# Altium PCB PCB-MOTION-V1.0.PcbDoc
Units mm, origin at the board's own origin, x right, y up, seen from the top; angles counter-clockwise.
Board outline 100 x 93 mm, 2 copper layers (Top Layer, Bottom Layer); 38 components, 31 nets, 120 pads, 10 vias.
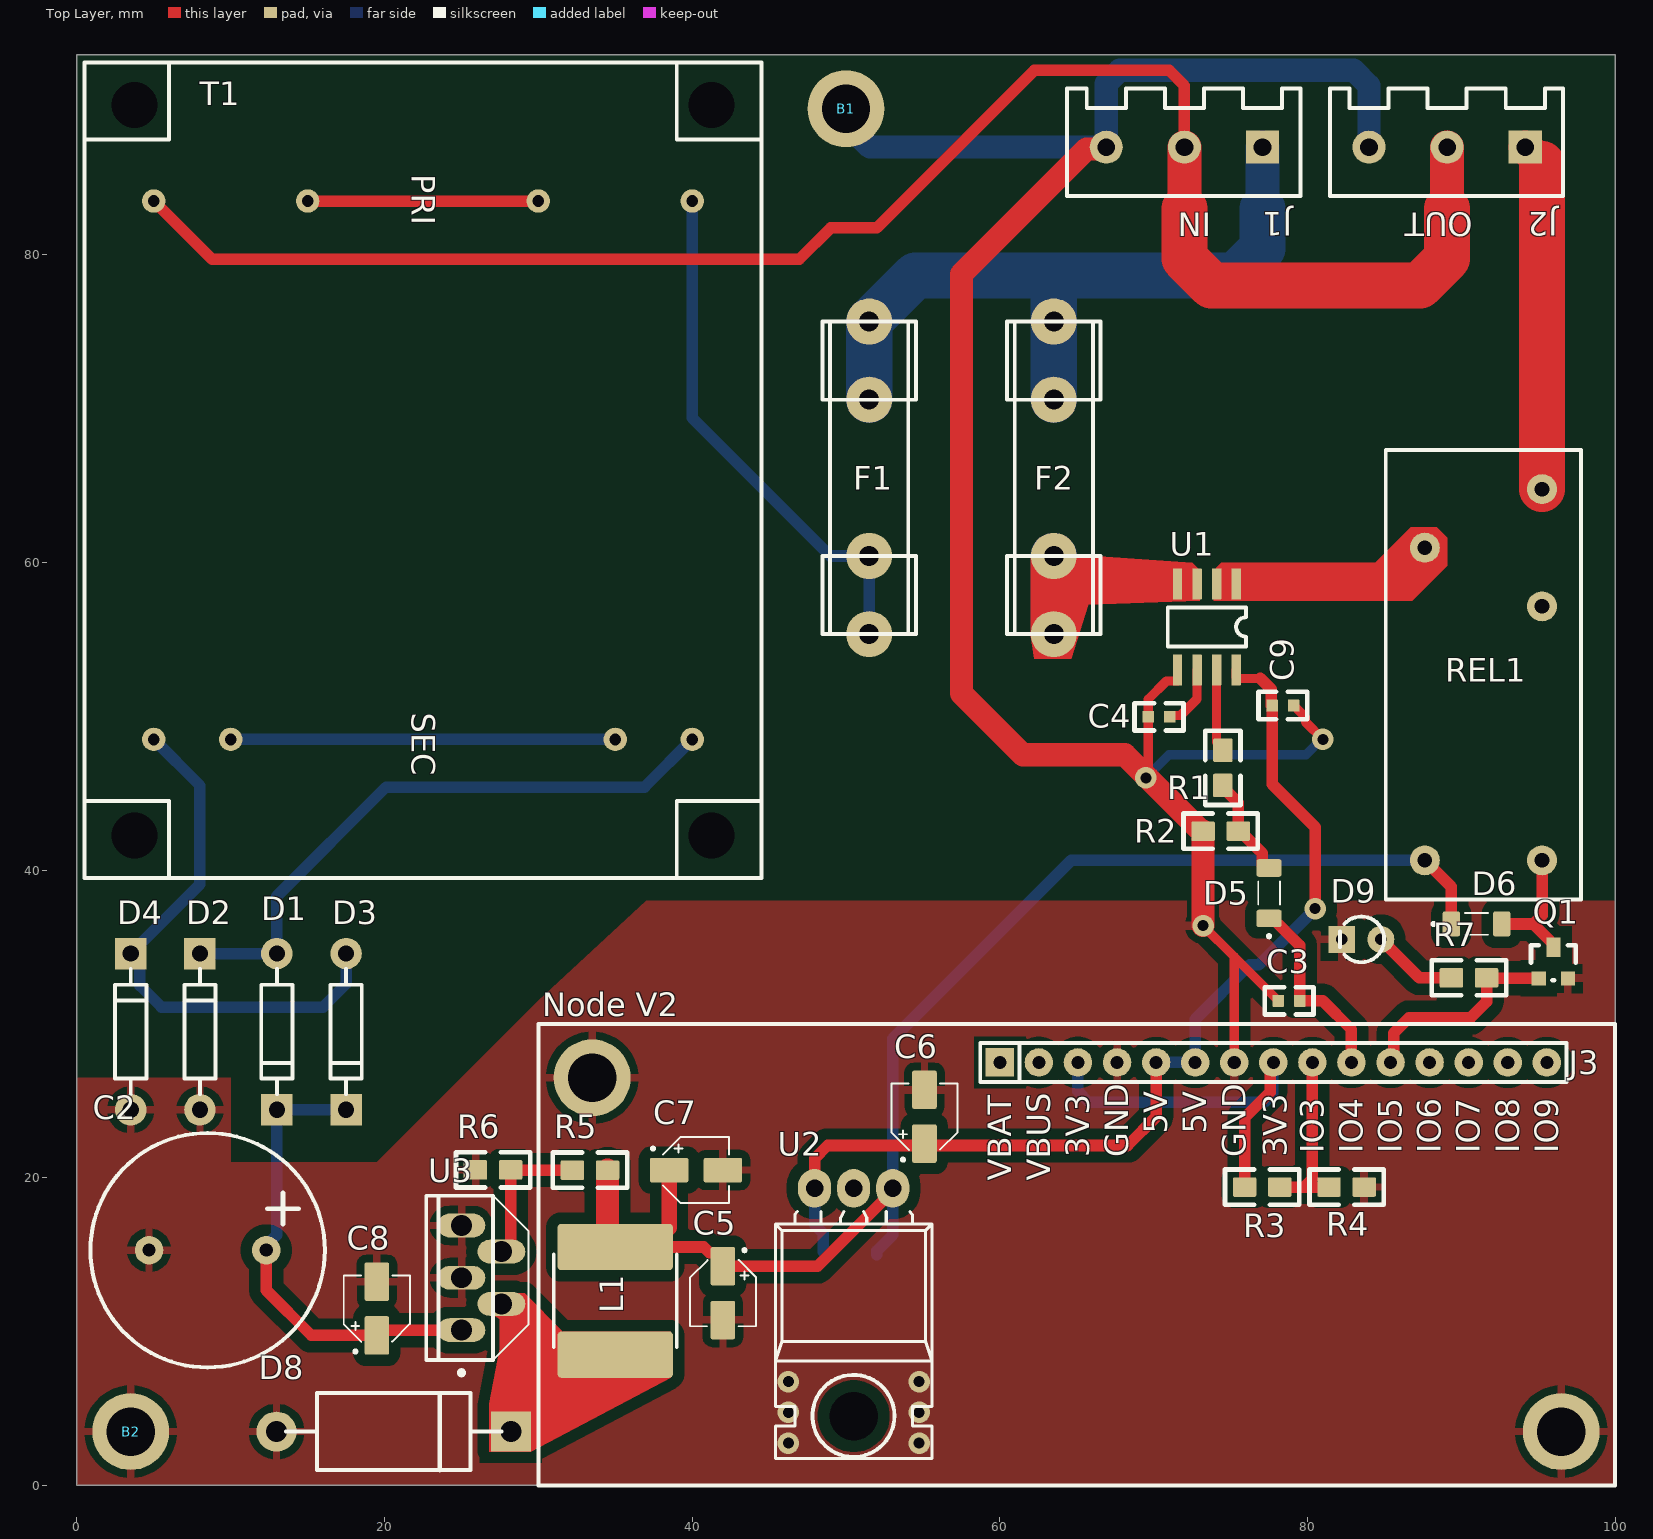
[diagram p0: Top Layer view]
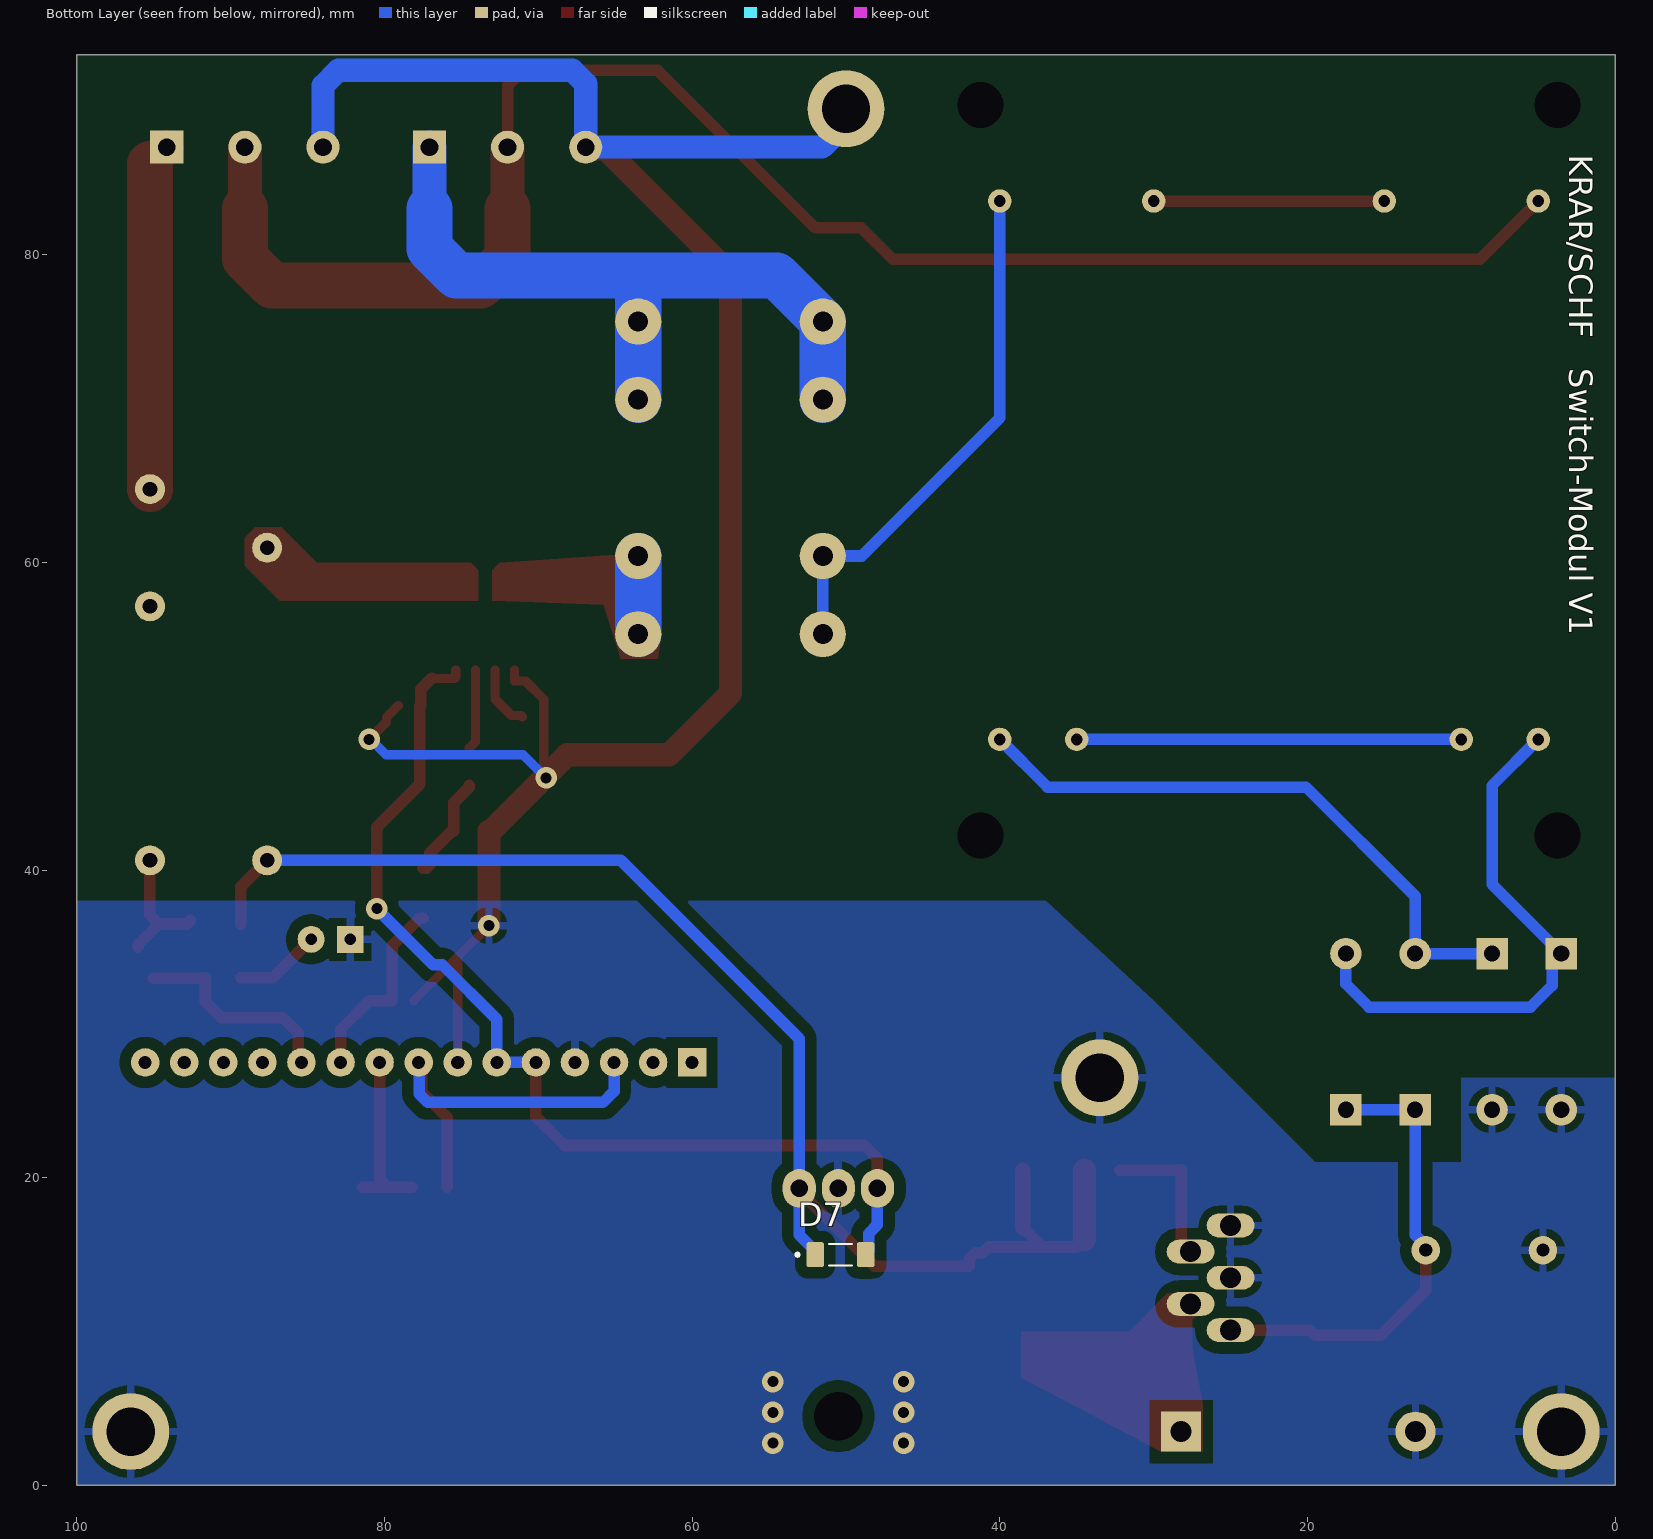
[diagram p1: Bottom Layer view, seen from below]

## Layer stack, top to bottom
Top Solder: solder mask 0.0102, Solder Resist, Dk 3.5
Top Layer: signal copper 0.0356
Dielectric 1: dielectric 0.32, FR-4, Dk 4.8
Bottom Layer: signal copper 0.0356
Bottom Solder: solder mask 0.0102, Solder Resist, Dk 3.5

## Board outline
0,0 0,93 100,93 100,0

## Design rules (kind name [scope] priority, off if disabled: settings)
Clearance [All] p1: gap=0.75 ignorepadtopadclearanceinfootprint=FALSE except(0.2: Arc-Arc Arc-Track Arc-SMDPad Arc-THPad Arc-Via Arc-Text Arc-Hole Track-Track Track-SMDPad Track-THPad Track-Via Track-Text Track-Hole SMDPad-SMDPad SMDPad-THPad SMDPad-Via SMDPad-Text SMDPad-Hole THPad-THPad THPad-Via THPad-Text THPad-Hole Via-Via Via-Text Via-Hole Text-Text Text-Hole)
HoleSize [All] p1: absolutevalues=TRUE maxlimit=6 minlimit=0.4 maxpercent=80.000 minpercent=20.000
MinimumAnnularRing [All] p1: minimumring=0.25
MinimumSolderMaskSliver [All] p1: minsoldermaskwidth=0
PolygonConnect [All] p1: connectstyle=Relief reliefconductorwidth=0.5 reliefentries=4 polygonreliefangle="90 Angle" airgapwidth=0.5
RoutingVias [All] p1: holewidth=0.85 width=1.85 viastyle="Through Hole" minholewidth=0.4 minwidth=1.4 maxholewidth=2 maxwidth=4
SilkToSilkClearance [All] p1: silktosilkclearance=0
SilkToSolderMaskClearance [IsPad] p1: minsilkscreentomaskgap=0 clearancetoexposedcopper=TRUE
SolderMaskExpansion [All] p1: expansion=0.102 istentingtop=FALSE
Width [All] p1: maxlimit=6 minlimit=0.2 preferedwidth=0.5
26 further rules are at their usual default settings.

## Classes and differential pairs
component class Sheet1: C2 C3 C4 C5 C6 C7 C8 C9 D1 D2 D3 D4 D5 D6 D7 D8 D9 F1 F2 J1 J2 J3 L1 Q1 R1 R2 R3 R4 R5 R6 R7 REL1 T1 U1 U2 U3

## Components (designator, comment, footprint, x,y, rotation, side; value= is the part's Value field where it differs from the comment)
B1 "Schraube" "B_Schraube-M3 PAD" 50,89.5 r0 top
B2 "Schraube" "B_Schraube-M3 PAD" 3.5,3.5 r0 top
C2 "2200µF" C_THT_RB-.3/.6 8.5,15.292 r0 top
C3 "100n" C_SMD_0603 78.802,31.5 r180 top
C4 "100n" C_SMD_0603 70.347,49.969 r180 top
C5 "10µF" C_SMD_B-Typ 42,12.5 r270 top
C6 "10µF" C_SMD_B-Typ 55.1,23.973 r90 top
C7 "470µF" C_SMD_B-Typ 40.25,20.5 r0 top
C8 "100µF" C_SMD_B-Typ 19.5,11.5 r90 top
C9 "1µF" C_SMD_0603 78.401,50.7 r0 top
D1 "1N4007" D_THT_0.4 13,29.5 r270 top
D2 "1N4007" D_THT_0.4 8,29.5 r90 top
D3 "1N4007" D_THT_0.4 17.5,29.5 r270 top
D4 "1N4007" D_THT_0.4 3.5,29.5 r90 top
D5 "1N4148" SOD-80-2 77.5,38.5 r90 top
D6 "1N4148" SOD-80-2 90.99,36.5 r0 top
D7 "1N4148" SOD-80-2 50.36,15 r180 bottom
D8 "1N5817" D_THT_0.6 20.597,3.5 r0 top
D9 "RED" D_THT_LED-3 83.5,35.5 r180 top
F1 "100mA" F_THT_Fuse2pol 51.5,65.5 r270 top
F2 "8A" F_THT_Fuse2pol 63.5,65.5 r270 top
J1 "IN" "J_THT_Printklemme 3x" 72,87 r180 top
J2 "OUT" "J_THT_Printklemme 3x" 89.08,87 r180 top
J3 "MODULE_COM" SIP-15_Node_V2 30,0 r0 top
L1 "100µH" L_SMD_NPIS42LS 35,15 r180 top
Q1 "BC846" SOT-23-3_BC846 95.035,32.968 r0 top
R1 "2k" R_SMD_0805 74.5,46.65 r90 top
R2 "10k" R_SMD_0805 74.357,42.535 r180 top
R3 "100K" R_SMD_0805 77.057,19.4 r180 top
R4 "900K" R_SMD_0805 82.543,19.4 r180 top
R5 "2k" R_SMD_0805 33.357,20.5 r180 top
R6 "2k" R_SMD_0805 27.053,20.511 r180 top
R7 "120" R_SMD_0805 90.5,33 r180 top
REL1 "#Wert" "Rel_THT_1x 2" 87.63,40.64 r90 top
T1 "T_THT_FL4" FL_4_Trafo 0.5,92.5 r270 top
U1 "U_ACS712ELCTR-20A-T" SO-8 75.364,58.605 r270 top
U2 "LM7805" TO-220-3H 50.5,4.5 r180 top
U3 "LM257X" TO220-5V 26.3,13.5 r90 top

## Footprints (in the part's own frame and the unit in brackets; to place one, negate y for a bottom-side part, rotate by r counter-clockwise, add the part's x,y. Pads: shape width x height; smd on the part's side, far side on the other; paste and mask are expansions set on the pad)
"B_Schraube-M3 PAD" [mm] "LB-2024-04-18"
  round 5 hole 3.15 unplated: 1(0,0)
C_SMD_0603 [mil] "LB-2024-04-17"
  rrect10% 30x30 smd paste-0.79 mask+1.97: 1(-27.5,0) 2(27.5,0)
  silkscreen extent -63,-35 63,35
C_SMD_B-Typ [mm] "LB-2024-04-16"
  rrect15% 2.5x1.6 smd paste-0.02 mask+0.05: 1(-1.75,0) 2(1.75,0)
  silkscreen extent -2.89,-2.15 2.15,2.15
C_THT_RB-.3/.6 [mm] "LB-2024-04-15"
  round 1.85 hole 0.85: 1(3.81,0) 2(-3.81,0)
  silkscreen extent -7.62,-7.62 7.62,7.62
D_THT_0.4 [mm] "LB-2024-04-17"
  round 2.05 hole 1.05: 1(-5.08,0)
  rect 2.05x2.05 hole 1.05: 2(5.08,0)
  silkscreen extent -4.06,-1.02 4.06,1.02
D_THT_0.6 [mm] "LB-2024-04-17"
  round 2.6 hole 1.35: 1(-7.62,0)
  rect 2.6x2.6 hole 1.35: 2(7.62,0)
  silkscreen extent -7,-2.5 7.02,2.5
D_THT_LED-3 [mm] "LB-2024-04-17"
  round 1.75 hole 0.75: 1(-1.27,0)
  rect 1.75x1.75 hole 0.75: 2(1.27,0)
  silkscreen extent -1.49,-1.49 1.4,1.49
F_THT_Fuse2pol [mm] "LB-2024-04-17"
  round 3 hole 1.3: 1(-10.163,0.008) 1(-5.083,0.008) 2(5.077,0.008) 2(10.157,0.008)
  silkscreen extent -10.16,-3.04 10.16,3.06
FL_4_Trafo [mm]
  round 0 hole 3 unplated: 0(2.75,40.75) 0(2.75,3.25) 0(50.25,40.75) 0(50.25,3.25)
  round 1.524 hole 0.762: 1(9,39.5) 2(9,29.5) 3(9,14.5) 4(9,4.5) 5(44,39.5) 6(44,34.5) 7(44,9.5) 8(44,4.5)
  Multi-Layer circle w0.254: c2.75,2.75 r0.25
  silkscreen extent 0,0 53,44
"J_THT_Printklemme 3x" [mm] "LB-2024-04-17"
  rect 2.15x2.15 hole 1.15: 1(-5.08,0)
  round 2.15 hole 1.15: 2(0,0) 3(5.08,0)
  silkscreen extent -7.54,-3.81 7.62,3.18
L_SMD_NPIS42LS [mm] "LB-2024-04-17"
  rrect15% 7.5x3 smd paste-0.02 mask+0.05: 1(0,-0.5) 2(0,6.5)
  silkscreen extent -4,0 4,6
R_SMD_0805 [mil] "LB-2024-04-17"
  rrect15% 60x50 smd paste-0.79 mask+1.97: 1(-45,0) 2(45,0)
  silkscreen extent -95,-45 95,45
"Rel_THT_1x 2" [mm] "LB-2024-04-18"
  round 1.95 hole 0.95: 1(0,0) 2(0,-7.62) 3(20.32,0) 4(24.13,-7.62) 5(16.51,-7.62)
  silkscreen extent -2.54,-10.16 26.67,2.54
SIP-15_Node_V2 [mm] "LB-2024-04-17"
  rect 1.85x1.85 hole 0.85: 1(30,27.5)
  round 1.85 hole 0.85: 2(32.54,27.5) 3(35.08,27.5) 4(37.62,27.5) 5(40.16,27.5) 6(42.7,27.5) 7(45.24,27.5) 8(47.78,27.5) 9(50.32,27.5) 10(52.86,27.5) 11(55.4,27.5) 12(57.94,27.5) 13(60.48,27.5) 14(63.02,27.5) 15(65.56,27.5)
  round 5 hole 3.15: 4(3.5,26.5) 4(66.5,3.5)
  silkscreen extent 0,0 70,30
SO-8 [mil] "LB-2024-04-17"
  rrect15% 80x24 smd paste-0.79 mask+1.97: 1(0,0) 2(0,-50) 3(0,-100) 4(0,-150) 5(220,-150) 6(220,-100) 7(220,-50) 8(220,0)
  silkscreen extent 60,-175 160,25
SOD-80-2 [mm] "SMD-Dioden Footprint z.b.: FDLL4148"
  rrect25% 1.14x1.63 smd: 1(1.64,0) 2(-1.64,0)
  silkscreen extent -2.89,-0.7 0.75,0.7
SOT-23-3_BC846 [mil] "SMD Footprint für BC846"
  rect 36x36 smd: B(0,0) E(75,0)
  rect 36x50 smd: C(38,80)
  silkscreen extent -20,-5 95,85
TO220-5V [mm] "LB-2024-0419"
  oval 1.55x3.1 hole 1.35: 1(-3.4,1.3) 2(-1.7,-1.3) 3(0,1.3) 4(1.7,-1.3) 5(3.4,1.3)
  silkscreen extent -6.37,-3.05 5.34,3.59
TO-220-3H [mm] "LB-2024-04-17"
  round 0 hole 3.15: 0(0,0)
  oval 2.15x2.5 hole 1.15: 1(-2.54,-14.817) 2(2.54,-14.817) 3(0,-14.817)
  silkscreen extent -5.08,-13.32 5.08,2.75

## Part data
B1 B2: library part B_Schraube, "Schraubenloch für M3 Schrauben"
C2: library part C_THT_ELK, "THT Elektrolytkondensator"
C3 C4 C9: library part C_SMD_KO, "Kondensator SMD Universal, Keramik, Folie, usw."
C5 C6 C7 C8: library part C_SMD_ELK, "SMD Elektrolytkondensator"
D1 D2 D3 D4: library part D_THT_Silizium, "Diode THT Silizium", Spannung For.=0,7V
D5 D6 D7: library part D_SMD_Silizium, "Diode SMD Silizium", Spannung For.=0,7V
D8: library part D_THT_Schottky, "Diode THT Schottky", Spannung For.=0,4V
D9: library part D_THT_LED, "Diode THT LED", Spannung For.=1,8V-3,6V
F1 F2: library part F_THT_Fuse, "Sicherung"
J1 J2: library part J_THT_CON3, "Stecker"
J3: library part J_THT_NODE_V2, "Stecker"
L1: library part L_SMD_Spule, "Spule SMD"
Q1: library part Q_SMD_NPN, "NPN Transistor"
R1 R2 R3 R4 R5 R6 R7: library part R_SMD_Widerstand, "Widerstand SMD"
REL1: library part Rel_THT_1x2, "Relais 1 Öffner, 1 Schließer"
T1: "Flachtrafo von Block 4VA / 2x Primär / 2x Sekundär"
U1: "Current Sensor 20A 1 Channel Hall Effect, Open Loop Bidirectional 8-SOIC (0.154, 3.90mm Width)", Package="SOIC-8 Allegro MicroSystems LLC", Availability="In Stock", Check_prices=https://www.snapeda.com/parts/ACS712ELCTR-20A-T/Allegro+Industries/view-part/?ref=eda, MF=Allegro, MP=ACS712ELCTR-20A-T, Price=None, Purchase-URL=https://pricing.snapeda.com/search/part/ACS712ELCTR-20A-T/?ref=eda, SnapEDA_Link=https://www.snapeda.com/parts/ACS712ELCTR-20A-T/Allegro+Industries/view-part/?ref=snap
U2: library part U_THT_78xx, "Linearwandler"
U3: library part U_THT_LM25xx, "Spanungswandler Step Up/Down"

## Via types
v1: diameter 1.4, hole 0.711, Top Layer to Bottom Layer, 10 vias

## Nets (pads, with @x,y where several pads share a name; then routed paths per layer and width w, separated by ;. In a path a pad name is that pad's centre, name@x,y a point inside that pad or via, vN(x,y) a via of type N, cw(c..) or ccw(c..) an arc to the next point about the centre after c; other vN are vias at no path point)
3,3V: J3.3 J3.8 R3.2 | length 26
  Top Layer w0.75: R3.2 75.914,23.914 77.57,25.57 77.57,27.29 J3.8
  Bottom Layer w0.75: J3.3 65.08,25.62 65.8,24.9 77.2,24.9 77.75,25.45 77.75,27.47 J3.8
5V: C6.1 C9.1 D7.1 J3.5 J3.6 U1.8 U2.2 | length 68.1
  Top Layer w0.6: U1.8 75.364,52.536 75.434,52.466 76.934,52.466
  Top Layer w0.75: U2.2 47.96,21.26 48.8,22.1 68.3,22.1 70.16,23.96 J3.5 ; 76.934,52.466 77.644,51.756 C9.1@77.644,50.7 ; C9.1 77.703,45.583 80.5,42.786 v1(80.5,37.5)
  Bottom Layer w0.75: U2.2 47.96,16.942 48.525,16.377 48.525,15.195 D7.1 ; J3.5 J3.6 72.7,30.3 76.238,33.838 76.838,33.838 v1(80.5,37.5)
12V: C5.1 C7.1 D6.2 D7.2 L1.1 R5.1 REL1.1 U2.1 | length 90.5
  Top Layer w0.75: L1.1@34.5,16 L1.1 L1.1@37.25,15.5 ; L1.1@38.5,16.75 L1.1@37.25,15.5 ; U2.1 53.04,19.142 48.148,14.25 C5.1 42,14.7 41.575,15.125 41.125,15.125 40.75,15.5 L1.1@37.25,15.5 ; REL1.1 89.35,38.92 D6.2
  Top Layer w1: L1.1@38.5,16.75 C7.1
  Top Layer w1.5: L1.1@34.5,16 R5.1
  Bottom Layer w0.75: D7.2 52,15.245 53.04,16.285 U2.1 53.04,29.04 64.64,40.64 REL1.1
18V: C2.1 C8.1 D1.2 D3.2 U3.1 | length 30.6
  Top Layer w0.75: C2.1 12.31,12.69 15.25,9.75 C8.1 19.85,10.1 U3.1
  Bottom Layer w0.75: C2.1 12.31,15.59 13,16.28 D1.2 D3.2
AC18_1: D1.1 D2.2 T1.5 | length 39.9
  Bottom Layer w0.75: D2.2 D1.1 13,38.3 20.1,45.4 36.9,45.4 T1.5
AC18_2: D3.1 D4.2 T1.8 | length 35.9
  Bottom Layer w0.75: T1.8 8,45.5 8,39.08 D4.2 4.1,33.98 4.1,32.5 5.5,31.1 16,31.1 17.5,32.6 D3.1
AC230_1: F1.1 F2.1 J1.1 | length 47.1
  Bottom Layer w2.2: 77.08,83 J1.1
  Bottom Layer w3: F1.1@51.508,70.583 51.508,75.663 54.508,78.663 62.008,78.663 ; 62.155,78.663 75.323,78.663 77.08,80.42 77.08,83 ; F2.1@63.508,70.583 63.508,75.663 63.508,78.663
AC230_2: J1.2 J2.2 T1.4 | length 111.1
  Top Layer w0.75: T1.4 8.8,79.7 46.95,79.7 49,81.75 52,81.75 62.25,92 71,92 72,91 J1.2
  Top Layer w2.2: 72,83 J1.2 ; 89.08,83 J2.2
  Top Layer w3: 72,83 72,79.757 73.757,78 87.323,78 89.08,79.757 89.08,83
FB: R5.2 R6.1 U3.4 | length 9.7
  Top Layer w0.75: U3.4 27.827,15.2 28.196,15.57 R6.1 28.202,20.505 32.209,20.505 R5.2
GND: B1.1 B2.1 C2.2 C3.2 C4.2 C5.2 C6.2 C7.2 C8.2 C9.2 D2.1 D4.1 D8.1 D9.2 J1.3 J2.3 J3.4 J3.7 Q1.E R2.2 R4.1 R6.2 U1.5 U2.3 U3.3 U3.5 | length 147.7
  Top Layer w0.6: v1@69.649,46 C4.2 69.649,51.112 70.838,52.301 71.549,52.301 71.554,52.305 U1.5 ; R2.2@73.122,42.5 73.179,42.5 R2.2 ; v1(73.214,36.389) 75.24,34.363 ; J3.7 75.24,34.363 ; C3.2 75.24,34.363 ; C9.2 79.869,49.931 79.869,49.631 v1(81,48.5)
  Top Layer w1.5: J1.3 66.796,86.876 65.626,86.876 57.5,78.75 57.5,51.5 61.5,47.5 68.122,47.5 v1@69.561,46.061 ; v1@69.649,45.973 R2.2@73.122,42.5 ; v1(73.214,36.389) R2.2
  Bottom Layer w0.6: v1(69.5,46) 71,47.5 79.903,47.5 80.903,48.5 v1(81,48.5)
  Bottom Layer w1.5: B1.1@50.129,89.5 B1.1 50,88.553 51.553,87 J1.3 66.92,91.121 67.799,92 83,92 84,91 J2.3
  other v1: 46.25,2.75 54.75,2.75 46.25,4.75 54.75,4.75 46.25,6.75 54.75,6.75
IP+: REL1.3 U1.1 U1.2
IP-: F2.2 U1.3 U1.4 | length 5.1
  Bottom Layer w3: F2.2@63.508,55.343 F2.2@63.508,60.423
NetC3_1: C3.1 D5.2 J3.10 | length 12.6
  Top Layer w0.75: D5.2 77.745,36.86 79.5,35.105 C3.1 81,31.5 82.86,29.64 J3.10
NetC4_1: C4.1 U1.6 | length 4.1
  Top Layer w0.6: C4.1 71.127,50.05 71.75,50.05 72.824,51.124 U1.6
NetD5_1: D5.1 R1.1 R2.1 | length 6.8
  Top Layer w0.75: R1.1 74.5,45.38 75.5,44.38 R2.1 75.627,42.535 77.06,41.102 77.06,40.335 77.255,40.14 D5.1
NetD6_1: D6.1 Q1.C REL1.2 | length 8.6
  Top Layer w0.75: D6.1@92.63,36.745 92.63,36.695 92.825,36.5 94.678,36.5 ; REL1.2 95.25,37.072 94.678,36.5 ; Q1.C 96,35.178 94.678,36.5
NetD8_2: D8.2 L1.2 U3.2
NetD9_1: D9.1 R7.2 | length 5.6
  Top Layer w0.75: D9.1 87.27,33 R7.2
NetF1_2: F1.2 T1.1 | length 34.4
  Bottom Layer w0.75: T1.1 40,69.4 48.977,60.423 51.508,60.423 F1.2@51.508,55.343
NetJ2_1: J2.1 REL1.4 | length 22.7
  Top Layer w2.2: J2.1 95.25,85.91
  Top Layer w3: REL1.4 95.25,85.91
NetJ3_9: J3.9 R3.1 R4.2 | length 11.5
  Top Layer w0.75: R3.1 79.8,19.4 ; J3.9 80.32,19.92 79.8,19.4 ; R4.2 79.8,19.4
NetJ3_11: J3.11 Q1.B R7.1 | length 13.8
  Top Layer w0.75: J3.11 85.61,27.71 85.61,29.41 86.6,30.4 90.6,30.4 91.643,31.443 R7.1 91.659,32.984 95.019,32.984 Q1.B
NetJ3_12: J3.12
NetJ3_13: J3.13
NetJ3_14: J3.14
NetJ3_15: J3.15
NetR1_2: R1.2 U1.7 | length 5.4
  Top Layer w0.6: U1.7 74.094,48.326 74.5,47.92 R1.2
NetT1_2: T1.2 T1.3 | length 15
  Top Layer w0.75: T1.3 T1.2
NetT1_6: T1.6 T1.7 | length 25
  Bottom Layer w0.75: T1.7 T1.6
V_BAT: J3.1
VBUS: J3.2
pads on no net: REL1.5 T1.0 U2.0

## Polygon pours and split planes (outlines as drawn)
GND on Bottom Layer "GND_L02_P001" (solid, pour order 1): 100,38 37,38 30,31.5 19.5,21 10,21 10,26.5 0,26.5 0,0 100,0
GND on Top Layer "GND_L01_P000" (solid, pour order 0): 100,38 37,38 30,31.5 19.5,21 10,21 10,26.5 0,26.5 0,0 100,0

## Other copper
Top Layer:
  region net NetD8_2: 27,12.5 29.1,12.5 31.6,10 38.6,10 38.6,7 29.5,2.2 26.8,2.2 26.8,5.3 27.48,8.897 27.48,10.8 27.2,11
  region net IP+: 73.9,57.5 73.9,59.5 74.4,60 84.4,60 86.7,62.3 88.4,62.3 89.1,61.6 89.1,59.8 86.8,57.5
  region net IP-: 73,59.5 73,57.5 65.75,57.25 64.654,53.75 62.25,53.75 62,55.25 62,60.5 65,60.5 72.5,60

## Silkscreen, mask and mechanical layers (free items; w line width, h text height)
Top Overlay:
  text "IN" at 73.746,82.746 h1.52 r180
  text "OUT" at 90.746,82.746 h1.52 r180
Bottom Overlay:
  text "KRAR/SCHF   Switch-Modul V1" at 2.996,86.496 h1.52 r90
Route Tool Path:
  lines w1: 68.4,55.9 78.4,55.9
Kontur:
  the board outline again, w0.254

## Text inside footprints (layer, text, board x,y; h text height)
J3: Top Overlay "Node V2" at 30.254,30.504 h1.52; Top Overlay "IO6" at 88.674,21.598 h1.52 r90; Top Overlay "IO9" at 96.294,21.598 h1.52 r90; Top Overlay "IO8" at 93.754,21.598 h1.52 r90; Top Overlay "IO7" at 91.214,21.598 h1.52 r90; Top Overlay "IO5" at 86.134,21.598 h1.52 r90; Top Overlay "IO4" at 83.594,21.598 h1.52 r90; Top Overlay "IO3" at 81.054,21.598 h1.52 r90; Top Overlay "VBAT" at 60.734,19.82 h1.52 r90; Top Overlay "VBUS" at 63.274,19.82 h1.52 r90; Top Overlay "3V3" at 78.655,21.368 h1.52 r90; Top Overlay "3V3" at 65.814,21.344 h1.52 r90; Top Overlay "5V" at 73.434,22.868 h1.52 r90; Top Overlay "5V" at 70.894,22.868 h1.52 r90; Top Overlay "GND" at 75.974,21.344 h1.52 r90; Top Overlay "GND" at 68.354,21.344 h1.52 r90
T1: Top Overlay "SEC" at 21.754,50.246 h1.52 r270; Top Overlay "PRI" at 21.754,85.246 h1.52 r270